# EAGLE board LTC4063-TestBoard (EAGLE 6.3)
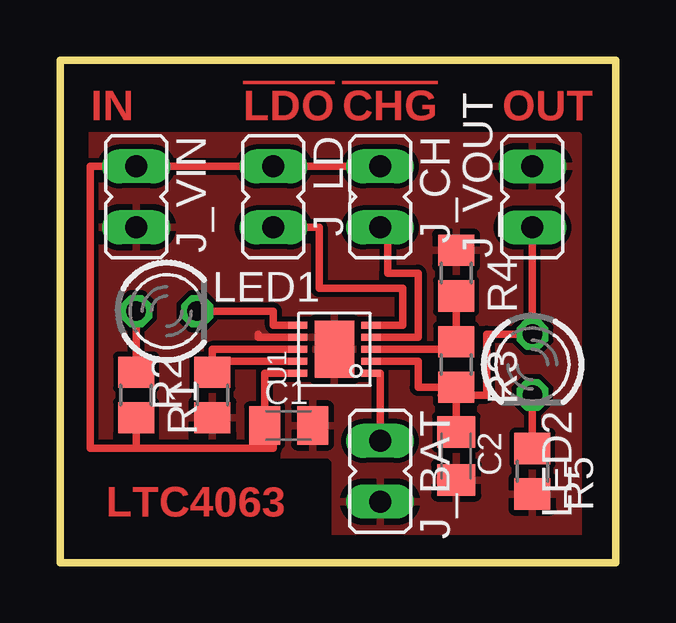
[diagram p0: board, top side]

Size 23.16 x 20.95 mm. Coordinates in mm from the lower left corner, seen from the top.
Outline: 0,0 23.16,0 23.16,20.95 0,20.95 0,0
Copper layers (1*16): Top 0.035mm / dielectric 1.5mm / Bottom 0.035mm
Design rules "default": minimum track width 10mil, minimum drill 24mil, track to track 8mil, track to pad 8mil, pad to pad 8mil, via to via 8mil, smd to smd 8mil, copper to edge 40mil, drill to drill 8mil, minimum pad ring 10mil, minimum via ring 8mil, stop-mask expansion 4mil, vias tented up to drill 0mil, thermal gap 10mil
tRestrict: area 1,1 to 11.1,4.1

## Footprints (pad centres in the part's own frame; a part is rotated, then mirrored left to right if it is on the bottom)
C0805K = smd 1.3 x 1.6: 1 -1,0; 2 1,0
JP1 = drill 0.914 long: 1 0,-1.27; 2 0,1.27
LED3MM = drill 0.813 octagon: A -1.27,0; K 1.27,0
R0805 = smd 1.3 x 1.5: 1 -0.95,0; 2 0.95,0
LTC4063 = smd 0.3 x 0.8: P1 -1,-1.525; P2 -0.5,-1.525; P3 0,-1.525; P4 0.5,-1.525; P5 1,-1.525; P6 1,1.525; P7 0.5,1.525; P8 0,1.525; P9 -0.5,1.525; P10 -1,1.525 | smd 2.38 x 1.65: P11 0,0

## Placement (x,y rotation side)
C1  1u  [C0805K]  9.53,5.71 0 top
C2  2.2u  [C0805K]  16.51,4.45 270 top
J_BAT  [JP1]  13.34,3.81 180 top
J_CH  [JP1]  13.34,15.24 180 top
J_LD  [JP1]  8.89,15.24 180 top
J_VIN  [JP1]  3.17,15.24 180 top
J_VOUT  [JP1]  19.68,15.24 0 top
LED1  [LED3MM]  4.45,10.48 0 top
LED2  [LED3MM]  19.68,8.26 270 top
R1  330  [R0805]  3.17,6.99 270 top
R2  715k  [R0805]  6.35,6.99 90 top
R3  440k  [R0805]  16.51,8.26 270 top
R4  160k  [R0805]  16.51,12.06 270 top
R5  150  [R0805]  19.68,3.81 270 top
U1  LTC4063  [LTC4063]  11.43,8.89 90 top

## Library data of the parts
C1 C2 R1-R5 = rcl
J_BAT J_CH J_LD J_VIN J_VOUT = jumper
LED1 LED2 = led
U1 = LinearTechnology

## Nets
!CH: J_LD.2 U1.P5
!LD: J_CH.2 U1.P4
+3V3: C2.1 J_VOUT.1 LED2.A R3.2 U1.P2
+5V: C1.1 J_CH.1 J_LD.1 J_VIN.1 R1.2 U1.P10
GND: C1.2 C2.2 J_BAT.2 J_VIN.2 J_VOUT.2 R2.1 R4.1 R5.2 U1.P7 U1.P11
N$1: R3.1 R4.2 U1.P3
N$2: J_BAT.1 U1.P1
N$3: LED1.K U1.P6
N$4: LED1.A R1.1
N$5: R2.2 U1.P8 U1.P9
N$6: LED2.K R5.1

## Tracks (layer width: path | path; a pad name or v marks a point on that pad's centre or on a via)
!CH
  Top 0.305: J_LD.2 10.79,13.97 10.79,13.34 10.79,11.43 14.29,11.43 14.29,9.89 U1.P5
!LD
  Top 0.305: J_CH.2 13.65,13.97 13.65,13.34 13.65,12.06 14.92,12.06 14.92,9.39 U1.P4
+3V3
  Top 0.305: U1.P2 14.92,8.39 14.92,7.3 R3.2 | R3.2 C2.1 | R3.2 15.88,6.99 17.78,6.99 17.78,9.53 LED2.A J_VOUT.1
+5V
  Top 0.305: U1.P10 8.53,7.89 C1.1 8.89,5.71 8.89,4.76 3.17,4.76 R1.2 3.17,4.76 1.27,4.76 1.27,16.51 J_VIN.1 J_LD.1 J_CH.1
GND
  Top 0.305: U1.P7 8.26,9.39 8.26,9.53
  pour Top: 0,17.78 0,0 21.59,0 21.59,17.78
N$1
  Top 0.305: U1.P3 15.88,8.89 R3.1 R4.2
N$2
  Top 0.305: J_BAT.1 13.34,7.89 U1.P1
N$3
  Top 0.305: U1.P6 8.89,9.89 8.89,10.48 LED1.K
N$4
  Top 0.305: R1.1 LED1.A
N$5
  Top 0.305: U1.P9 6.35,8.39 R2.2 6.35,8.89 U1.P8
N$6
  Top 0.305: LED2.K R5.1

## Text on the board
Top: IN | !LDO | !CHG | OUT | LTC4063